# Altium PCB PCB1.PcbDoc
Units mm, origin at the board's own origin, x right, y up, seen from the top; angles counter-clockwise.
Board outline 22.22 x 65.28 mm, 2 copper layers (Top Layer, Bottom Layer), stack 1.571 mm thick; 28 components, 12 nets, 85 pads, 53 vias.
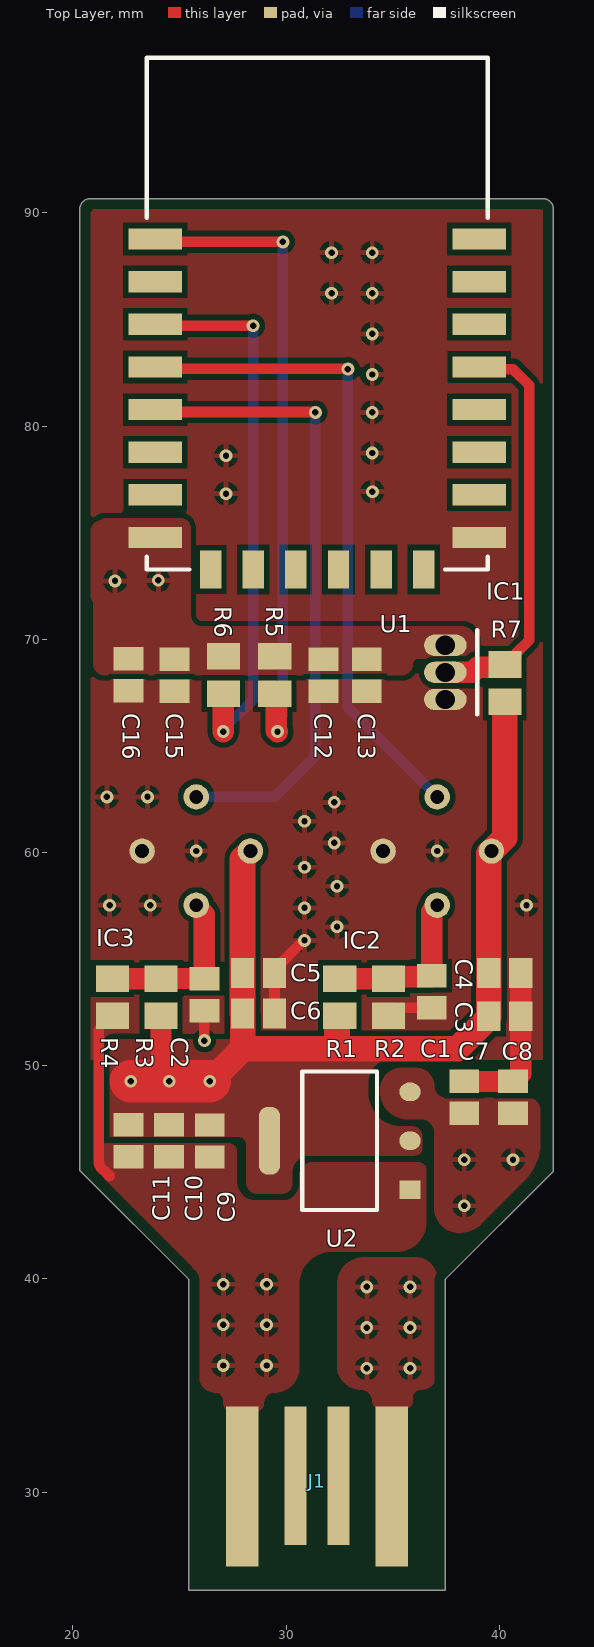
[diagram p0: Top Layer view]
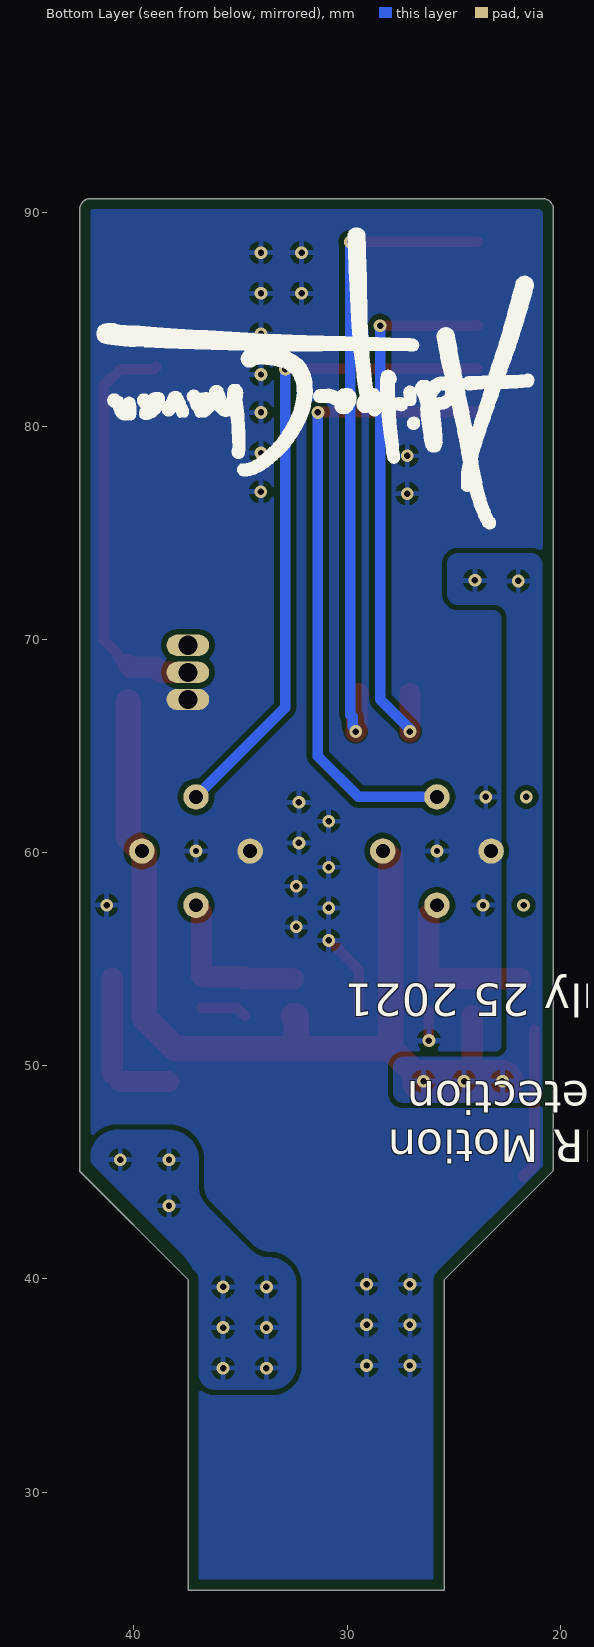
[diagram p1: Bottom Layer view, seen from below]

## Layer stack, top to bottom
Top Solder: solder mask 0.0102, Solder Resist, Dk 3.5
Top Layer: signal copper 0.0356
Dielectric 1: dielectric 1.5, FR-4, Dk 4.8
Bottom Layer: signal copper 0.0356
Bottom Solder: solder mask 0.0102, Solder Resist, Dk 3.5

## Board outline
20.32,45.085 20.32,50.8 20.32,90.17 cw(c20.828,90.17) 20.828,90.678 42.027,90.678 cw(c42.027,90.17) 42.535,90.17 42.535,90.16 42.535,50.8 42.535,45.05 37.455,39.97 37.455,25.4 25.435,25.4 25.435,39.97

## Design rules (kind name [scope] priority, off if disabled: settings)
BoardOutlineClearance [All] p1: gap=0.5 ignorepadtopadclearanceinfootprint=FALSE
Clearance [All] p1: gap=0.254 ignorepadtopadclearanceinfootprint=FALSE except(0: Arc-Hole Track-Hole SMDPad-Hole THPad-Hole Via-Hole Fill-Hole Poly-Hole Region-Hole Text-Hole)
ComponentClearance [All] p1: gap=0.051 collisioncheckmode=3 verticalgap=0 showdistances=FALSE
PolygonConnect PolygonConnect_12 [All vs IsNamedPolygon('GND_L01_P023')] p1: thpad.connectstyle=Direct thpad.reliefconductorwidth=0.254 thpad.reliefentries=4 thpad.polygonreliefangle="90 Angle" thpad.airgapwidth=0.254 smdpad.connectstyle=Direct smdpad.reliefconductorwidth=0.254 smdpad.reliefentries=4 smdpad.polygonreliefangle="90 Angle" smdpad.airgapwidth=0.254 via.connectstyle=Relief via.reliefconductorwidth=0.254 via.reliefentries=4 via.polygonreliefangle="90 Angle" via.airgapwidth=0.254
PolygonConnect PolygonConnect_11 [All vs IsNamedPolygon('+5_L01_P000') Or IsNamedPolygon('+5_L01_P001') Or IsNamedPolygon('GND_L01_P008') Or IsNamedPolygon('GND_L01_P013') Or IsNamedPolygon('GND_L01_P018') Or IsNamedPolygon('VCC_L01_P015') Or IsNamedPolygon('VCC_L01_P017') Or IsNamedPolygon('VCC_L01_P022') Or IsNamedPolygon('VCC_L01_P023') Or IsNamedPolygon('+5_L02_P002') Or IsNamedPolygon('GND_L02_P021') Or IsNamedPolygon('VCC_L02_P019')] p2: thpad.connectstyle=Direct thpad.reliefconductorwidth=0.254 thpad.reliefentries=4 thpad.polygonreliefangle="90 Angle" thpad.airgapwidth=0.254 smdpad.connectstyle=Direct smdpad.reliefconductorwidth=0.254 smdpad.reliefentries=4 smdpad.polygonreliefangle="90 Angle" smdpad.airgapwidth=0.254 via.connectstyle=Relief via.reliefconductorwidth=0.254 via.reliefentries=4 via.polygonreliefangle="90 Angle" via.airgapwidth=0.254
PolygonConnect PolygonConnect_10 [All vs IsNamedPolygon('+5_L01_P000') Or IsNamedPolygon('+5_L01_P001') Or IsNamedPolygon('GND_L01_P008') Or IsNamedPolygon('GND_L01_P013') Or IsNamedPolygon('GND_L01_P018') Or IsNamedPolygon('VCC_L01_P015') Or IsNamedPolygon('VCC_L01_P017') Or IsNamedPolygon('VCC_L01_P022') Or IsNamedPolygon('+5_L02_P021') Or IsNamedPolygon('GND_L02_P002') Or IsNamedPolygon('VCC_L02_P019')] p3: thpad.connectstyle=Direct thpad.reliefconductorwidth=0.254 thpad.reliefentries=4 thpad.polygonreliefangle="90 Angle" thpad.airgapwidth=0.254 smdpad.connectstyle=Direct smdpad.reliefconductorwidth=0.254 smdpad.reliefentries=4 smdpad.polygonreliefangle="90 Angle" smdpad.airgapwidth=0.254 via.connectstyle=Relief via.reliefconductorwidth=0.254 via.reliefentries=4 via.polygonreliefangle="90 Angle" via.airgapwidth=0.254
PolygonConnect PolygonConnect_9 [All vs IsNamedPolygon('VCC_L01_P017')] p4: thpad.connectstyle=Direct thpad.reliefconductorwidth=0.254 thpad.reliefentries=4 thpad.polygonreliefangle="90 Angle" thpad.airgapwidth=0.254 smdpad.connectstyle=Direct smdpad.reliefconductorwidth=0.254 smdpad.reliefentries=4 smdpad.polygonreliefangle="90 Angle" smdpad.airgapwidth=0.254 via.connectstyle=Relief via.reliefconductorwidth=0.254 via.reliefentries=4 via.polygonreliefangle="90 Angle" via.airgapwidth=0.254
PolygonConnect PolygonConnect_8 [All vs IsNamedPolygon('GND_L01_P013')] p5: thpad.connectstyle=Direct thpad.reliefconductorwidth=0.254 thpad.reliefentries=4 thpad.polygonreliefangle="90 Angle" thpad.airgapwidth=0.254 smdpad.connectstyle=Direct smdpad.reliefconductorwidth=0.254 smdpad.reliefentries=4 smdpad.polygonreliefangle="90 Angle" smdpad.airgapwidth=0.254 via.connectstyle=Relief via.reliefconductorwidth=0.254 via.reliefentries=4 via.polygonreliefangle="90 Angle" via.airgapwidth=0.254
PolygonConnect PolygonConnect_7 [All vs IsNamedPolygon('VCC_L02_P011')] p6: thpad.connectstyle=Direct thpad.reliefconductorwidth=0.254 thpad.reliefentries=4 thpad.polygonreliefangle="90 Angle" thpad.airgapwidth=0.254 smdpad.connectstyle=Direct smdpad.reliefconductorwidth=0.254 smdpad.reliefentries=4 smdpad.polygonreliefangle="90 Angle" smdpad.airgapwidth=0.254 via.connectstyle=Relief via.reliefconductorwidth=0.254 via.reliefentries=4 via.polygonreliefangle="90 Angle" via.airgapwidth=0.254
PolygonConnect PolygonConnect_6 [All vs IsNamedPolygon('GND_L01_P008')] p7: thpad.connectstyle=Direct thpad.reliefconductorwidth=0.254 thpad.reliefentries=4 thpad.polygonreliefangle="90 Angle" thpad.airgapwidth=0.254 smdpad.connectstyle=Direct smdpad.reliefconductorwidth=0.254 smdpad.reliefentries=4 smdpad.polygonreliefangle="90 Angle" smdpad.airgapwidth=0.254 via.connectstyle=Relief via.reliefconductorwidth=0.254 via.reliefentries=4 via.polygonreliefangle="90 Angle" via.airgapwidth=0.254
PolygonConnect PolygonConnect_5 [All vs IsNamedPolygon('GND_L01_P005')] p8: thpad.connectstyle=Direct thpad.reliefconductorwidth=0.254 thpad.reliefentries=4 thpad.polygonreliefangle="90 Angle" thpad.airgapwidth=0.254 smdpad.connectstyle=Direct smdpad.reliefconductorwidth=0.254 smdpad.reliefentries=4 smdpad.polygonreliefangle="90 Angle" smdpad.airgapwidth=0.254 via.connectstyle=Relief via.reliefconductorwidth=0.254 via.reliefentries=4 via.polygonreliefangle="90 Angle" via.airgapwidth=0.254
PolygonConnect PolygonConnect_4 [All vs IsNamedPolygon('VCC_L01_P004')] p9: thpad.connectstyle=Direct thpad.reliefconductorwidth=0.254 thpad.reliefentries=4 thpad.polygonreliefangle="90 Angle" thpad.airgapwidth=0.254 smdpad.connectstyle=Direct smdpad.reliefconductorwidth=0.254 smdpad.reliefentries=4 smdpad.polygonreliefangle="90 Angle" smdpad.airgapwidth=0.254 via.connectstyle=Relief via.reliefconductorwidth=0.254 via.reliefentries=4 via.polygonreliefangle="90 Angle" via.airgapwidth=0.254
PolygonConnect PolygonConnect_3 [All vs IsNamedPolygon('VCC_L01_P003')] p10: thpad.connectstyle=Direct thpad.reliefconductorwidth=0.254 thpad.reliefentries=4 thpad.polygonreliefangle="90 Angle" thpad.airgapwidth=0.254 smdpad.connectstyle=Direct smdpad.reliefconductorwidth=0.254 smdpad.reliefentries=4 smdpad.polygonreliefangle="90 Angle" smdpad.airgapwidth=0.254 via.connectstyle=Relief via.reliefconductorwidth=0.254 via.reliefentries=4 via.polygonreliefangle="90 Angle" via.airgapwidth=0.254
PolygonConnect PolygonConnect_2 [All vs IsNamedPolygon('+5_L01_P001')] p11: thpad.connectstyle=Direct thpad.reliefconductorwidth=0.254 thpad.reliefentries=4 thpad.polygonreliefangle="90 Angle" thpad.airgapwidth=0.254 smdpad.connectstyle=Direct smdpad.reliefconductorwidth=0.254 smdpad.reliefentries=4 smdpad.polygonreliefangle="90 Angle" smdpad.airgapwidth=0.254 via.connectstyle=Relief via.reliefconductorwidth=0.254 via.reliefentries=4 via.polygonreliefangle="90 Angle" via.airgapwidth=0.254
PolygonConnect PolygonConnect_1 [All vs IsNamedPolygon('+5_L01_P000')] p12: thpad.connectstyle=Direct thpad.reliefconductorwidth=0.254 thpad.reliefentries=4 thpad.polygonreliefangle="90 Angle" thpad.airgapwidth=0.254 smdpad.connectstyle=Direct smdpad.reliefconductorwidth=0.254 smdpad.reliefentries=4 smdpad.polygonreliefangle="90 Angle" smdpad.airgapwidth=0.254 via.connectstyle=Relief via.reliefconductorwidth=0.254 via.reliefentries=4 via.polygonreliefangle="90 Angle" via.airgapwidth=0.254
PolygonConnect [All] p13: connectstyle=Relief reliefconductorwidth=0.254 reliefentries=4 polygonreliefangle="90 Angle" airgapwidth=0.254
RoomDefinition esp12f-1 [InComponentClass('esp12f-1')] p1: confinementstyle=ConfineIn formatcopy=TRUE lockcomponents=FALSE outline 0,0 50.8,0 50.8,25.4 0,25.4
RoutingVias [All] p1: holewidth=0.711 width=1.27 viastyle="Through Hole" minholewidth=0.711 minwidth=1.27 maxholewidth=0.711 maxwidth=1.27
SolderMaskExpansion [All] p1: expansion=0.102 istentingtop=FALSE
Width [All] p1: maxlimit=3 minlimit=0.254 preferedwidth=0.254
29 further rules are at their usual default settings.

## Components (designator, comment, footprint, x,y, rotation, side; value= is the part's Value field where it differs from the comment)
C1 "Cap Pol3" C0805 36.83,53.467 r270 top value=10u
C2 "Cap Pol3" C0805 26.162,53.34 r270 top value=10u
C3 "Cap Pol3" C0805 40.259,52.324 r0 top value=100u
C4 "Cap Pol3" C0805 40.259,54.356 r0 top value=100n
C5 "Cap Pol3" C0805 28.702,54.356 r0 top value=100u
C6 "Cap Pol3" C0805 28.702,52.451 r0 top value=100n
C7 "Cap Pol3" C0805 38.354,48.514 r90 top value=100u
C8 "Cap Pol3" C0805 40.64,48.514 r90 top value=1u
C9 "Cap Pol3" C0805 26.416,46.47 r270 top value=100u
C10 "Cap Pol3" C0805 24.511,46.482 r270 top value=10u
C11 "Cap Pol3" C0805 22.606,46.482 r270 top value=1u
C12 "Cap Pol3" C0805 31.75,68.326 r270 top value=100n
C13 "Cap Pol3" C0805 33.782,68.326 r270 top value=100n
C15 "Cap Pol3" C0805 24.765,68.326 r270 top value=10u
C16 "Cap Pol3" C0805 22.606,68.338 r270 top value=100n
IC1 "esp-12f" esp12f 31.455,85.279 r0 top
IC2 "BS412" BS412 34.544,60.071 r270 top locked
IC3 "BS412" BS412 23.241,60.071 r270 top locked
J1 "USB-A" USB-A-PCB 31.455,30.462 r90 top locked
R1 "WSLP0805R0400FEA" RESC2013X58X38NL25T25 32.512,53.213 r270 top
R2 "WSLP0805R0400FEA" RESC2013X58X38NL25T25 34.798,53.213 r270 top
R3 "WSLP0805R0400FEA" RESC2013X58X38NL25T25 24.13,53.213 r270 top
R4 "WSLP0805R0400FEA" RESC2013X58X38NL25T25 21.844,53.213 r270 top
R5 "WSLP0805R0400FEA" RESC2013X58X38NL25T25 29.464,68.326 r90 top
R6 "WSLP0805R0400FEA" RESC2013X58X38NL25T25 27.051,68.326 r90 top
R7 "WSLP0805R0400FEA" RESC2013X58X38NL25T25 40.259,67.945 r90 top
U1 "DS18B20+" Q3+1 37.465,68.453 r0 top
U2 "AMS1117-3.3" FP-AMS1117-IPC_C 32.512,46.482 r180 top

## Footprints (in the part's own frame and the unit in brackets; to place one, negate y for a bottom-side part, rotate by r counter-clockwise, add the part's x,y. Pads: shape width x height; smd on the part's side, far side on the other; paste and mask are expansions set on the pad)
BS412 [mm]
  round 1.192 hole 0.65: 1(0,0) 2(2.54,2.54) 3(0,5.08) 4(-2.54,2.54)
  silkscreen extent 60.07,-34.54 60.07,-34.54, body extent -4.55,-2.01 4.55,7.09, height 4.3
C0805 [mm] "Chip Capacitor, Body 2.0x1.3mm, IPC High Density"
  rect 1.1x1.4 smd: 1(-0.75,0) 2(0.75,0)
  body extent -1.1,-0.72 1.1,0.72, height 1.4
esp12f [mm]
  rect 2.5x1 smd: 1(-7.6,3.5) 2(-7.6,1.5) 3(-7.6,-0.5) 4(-7.6,-2.5) 5(-7.6,-4.5) 6(-7.6,-6.5) 7(-7.6,-8.5) 8(-7.6,-10.5) 15(7.6,-10.5) 16(7.6,-8.5) 17(7.6,-6.5) 18(7.6,-4.5) 19(7.6,-2.5) 20(7.6,-0.5) 21(7.6,1.5) 22(7.6,3.5)
  rect 1x1.8 smd: 9(-5,-12) 10(-3,-12) 11(-1,-12) 12(1,-12) 13(3,-12) 14(5,-12)
  silkscreen extent -31.45,-85.28 8,12, body extent -8,-12 8,12, height 3.2
FP-AMS1117-IPC_C [mm]
  rect 1.004x0.872 smd paste+0 mask+0: 1(-3.295,2.29)
  rrect100% 1.004x0.872 smd paste+0 mask+0: 2(-3.295,0) 3(-3.295,-2.29)
  rrect87% 1.004x3.182 smd paste+0 mask+0: 4(3.295,0)
  silkscreen extent -1.75,-3.25 32.51,46.48, body extent -3.9,-3.35 3.9,3.35, height 0.25
Q3+1 [mm] "TO, Flat Index; 3 In-Line, Axial Leads; Body Dia. 4.7mm; Leads 0.56 x 0.51 mm (max)"
  oval 2x1 hole 0.9: 1(0,-1.27) 2(0,0) 3(0,1.27)
  silkscreen extent 1.5,-1.98 1.5,1.98, body extent -2.48,-2.5 1.5,2.5, height 4.96
RESC2013X58X38NL25T25 [mm] "Chip Resistor, 2-Leads, Body 2.03x1.27mm, IPC Medium Density"
  rect 1.25x1.55 smd: 1(-0.875,0) 2(0.875,0)
  body extent -1.14,-0.76 1.14,0.76, height 0.59
USB-A-PCB [mil]
  rect 296x60 smd paste-196.85: 1(-7.87,-137.8) 4(-7.87,138)
  rect 256x40 smd paste-196.85: 2(12,-39.37) 3(12,40)

## Part data
C1 C2 C3 C4 C5 C6 C7 C8 C9 C10 C11 C12 C13 C15 C16: "Polarized Capacitor (Surface Mount)", LatestRevisionDate=29-May-2009, LatestRevisionNote="IPC-7351 Footprint Added.", PackageDescription="Chip Capacitor", PackageReference=C0805, Published=8-Jun-2000, Publisher="Altium Limited"
IC1: "Integrated Circuit", Manufacturer_Name=Ai-Thinker, Datasheet Link=https://docs.ai-thinker.com/_media/esp8266/docs/esp-12f_product_specification_en.pdf, Height=3.1mm, Manufacturer_Part_Number=esp-12f
IC2 IC3: "Integrated Circuit", Manufacturer_Name="Senba Sensing Tech", Datasheet Link=https://datasheet.lcsc.com/szlcsc/1910111742_Senba-Sensing-Tech-BS412_C410378.pdf, Height=4.2mm, Manufacturer_Part_Number=BS412
J1: library part USB-A-PCB, "USB-A PCB footprint", Part number IPS=N.A., Artikkelnr Noca=N.A., ComponentLink1Description=Datasheet, ComponentLink2Description="Supplier link", Footprint Doc=USB-A-PCB, LatestRevisionDate=2014-06-04, Part Number=USB-A-PCB, Pin Count=4, Published=2014-06-04, Publisher="Nordic Semiconductor"
R1 R2 R3 R4 R5 R6 R7: library part CMP-2001-04325-1, Manufacturer="Vishay Dale", Part Number=WSLP0805R0400FEA
U1: library part CMP-0253-00003-1, "Programmable Resolution Digital Thermometer, 1-Wire Interface, ±0.5°C Accuracy, 3-Pin TO92, -55°C to +125°C, Pb-Free", Code_JEDEC=TO-226-AA, ComponentLink1Description="Manufacturer URL", ComponentLink1URL=http://www.maxim-ic.com, ComponentLink2Description=Datasheet, ComponentLink2URL=http://datasheets.maxim-ic.com/en/ds/DS18B20.pdf, DatasheetVersion=2007, PackageDescription="TO-92 Package, Body Dia. 4.7mm; Leads 0.51 x 0.51 mm (max), Pb-Free", PackageReference=Q3+1, PackageVersion="revB, 2009"
U2: library part CMP-209535-000001-1, "LDO Voltage Regulators 1A, 3.3V", Dropout Voltage=1.1V, Manufacturer="Advanced Monolithic Systems", Max Junction Temp=+125°C, Max Power Dissipation=1.2W, Max Supply Voltage=15V, Nominal Supply Current=5mA, Output Current=1A, Output Voltage=3.3V, Package=AMS1117, Temperature="-40°C to +125°C", Temperature Range Low=-40°C, Automotive=No, Category=IC, ComponentLink2Description=Datasheet, ComponentLink2URL=http://www.advanced-monolithic.com/pdf/ds1117.pdf, Device Class L1="Integrated Circuits (ICs)", Device Class L2="Power Management ICs", Device Class L3="Voltage Regulators - Linear", Height=1.8mm, Ipc Land Pattern Name=SOT229P700X180-4, Lead Free=Yes, Manufacturer Part Number=AMS1117-3.3, Number Of Outputs=1, Octopart=https://octopart.com/ams1117-3.3-advanced+monolithic+systems-25899300, Output Type=Fixed, RoHs=TRUE, Standoff Height=0.64mm, Temperature Range High=+125°C

## Via types
v1: diameter 0.6, hole 0.3, Top Layer to Bottom Layer, 53 vias

## Nets (pads, with @x,y where several pads share a name; then routed paths per layer and width w, separated by ;. In a path a pad name is that pad's centre, name@x,y a point inside that pad or via, vN(x,y) a via of type N, cw(c..) or ccw(c..) an arc to the next point about the centre after c; other vN are vias at no path point)
+5: C7.1 C8.1 J1.1 U2.3
  other v1: 33.782,35.814 35.814,35.814 33.782,37.719 35.814,37.719 33.782,39.624 35.814,39.624 38.354,43.434 38.354,45.593 40.64,45.593
GND: C1.2 C2.2 C3.2 C4.2 C5.2 C6.2 C7.2 C8.2 C9.2 C10.2 C11.2 C12.2 C13.2 C15.2 C16.2 IC1.15 IC2.1 IC3.1 J1.4 R2.2 R4.2 U1.1 U2.1 | length 21.2
  Top Layer w0.5: 21.209,51.689 21.209,45.52 ccw(c21.709,45.522) 21.378,45.146 21.562,44.985 cw(c21.231,44.61) 21.585,44.963 21.716,44.832 ; v1(26.162,51.181) C2.2 ; C6.2 C5.2@29.452,54.102 ; C5.2 29.452,54.506 30.826,55.88 v1(30.861,55.88) ; R2.2 35.173,52.713 35.612,52.713 35.616,52.717 C1.2
  Top Layer w1: C7.2 C8.2 ; C8.2@41.009,49.633 C3.2 C4.2@41.009,54.102
  other v1: 27.051,35.941 29.083,35.941 27.051,37.846 29.083,37.846 27.051,39.751 29.083,39.751 32.385,56.515 30.861,57.404 21.717,57.531 23.622,57.531 41.275,57.531 32.385,58.42 30.861,59.309 25.781,60.071 37.084,60.071 32.258,60.452 30.861,61.468 32.258,62.357 21.59,62.611 23.495,62.611 27.178,76.835 34.044,76.927 27.178,78.613 34.036,78.74 34.036,80.645 34.036,82.423 34.036,84.328 32.131,86.233 34.036,86.233 32.131,88.138 34.036,88.138
NetIC1_1: IC1.1 R5.1 | length 30.8
  Top Layer w0.5: IC1.1@23.866,88.652 23.869,88.649 29.842,88.649 v1(29.845,88.646)
  Top Layer w1: R5.1 29.539,67.376 29.539,65.725 v1(29.591,65.673)
  Bottom Layer w0.5: v1@29.591,65.786 29.738,65.933 29.738,66.357 29.845,66.464 v1(29.845,88.646)
NetIC1_3: IC1.3 R6.1 | length 25.9
  Top Layer w0.5: IC1.3@23.877,84.744 23.912,84.709 v1(28.448,84.709)
  Top Layer w1: v1(27.051,65.673) R6.1
  Bottom Layer w0.5: v1@27.051,65.719 27.07,65.719 27.07,65.805 28.448,67.183 v1(28.448,84.709)
NetLabel11: IC1.13
OnTime1: C1.1 IC2.2 R1.1 R2.1 | length 7.8
  Top Layer w1: R1.1 R2.1 34.877,54.167 36.78,54.167 C1.1 36.83,57.225 37.084,57.479 IC2.2
OnTime2: C2.1 IC3.2 R3.1 R4.1 | length 7.9
  Top Layer w1: R4.1 R3.1 24.131,54.089 C2.1 C2.1 26.162,57.098 25.781,57.479 IC3.2
PIR1: IC1.4 IC2.4 | length 30.8
  Top Layer w0.5: IC1.4@23.898,82.696 32.874,82.696 v1(32.893,82.677)
  Bottom Layer w0.5: v1(32.893,82.677) 32.893,66.802 IC2.4
PIR2: IC1.5 IC3.4 | length 30
  Top Layer w0.5: IC1.5@23.854,80.652 23.866,80.664 31.35,80.664 v1(31.369,80.645)
  Bottom Layer w0.5: IC3.4 29.464,62.611 31.369,64.516 v1(31.369,80.645)
SCK: IC1.20
SDA: IC1.19 R7.2 U1.2 | length 19.4
  Top Layer w0.5: IC1.19@38.953,82.779 39.055,82.677 40.64,82.677 41.402,81.915 41.402,69.963 40.784,69.345 40.784,69.195 40.409,68.82 R7.2
  Top Layer w1: U1.2 38.735,68.453 38.977,68.695 40.134,68.695 R7.2
VCC: C3.1 C4.1 C5.1 C6.1 C9.1 C10.1 C11.1 C12.1 C13.1 C15.1 C16.1 IC1.8 IC2.3 IC3.3 R1.2 R3.2 R5.2 R6.2 R7.1 U1.3 U2.2 U2.4 | length 47.4
  Top Layer w1: R3.2 24.13,49.73 24.511,49.349 v1(24.511,49.276)
  Top Layer w1.2: v1(26.416,49.276) 26.435,49.276 27.959,50.8 ; IC3.3 27.952,59.702 27.952,54.102 C6.1 27.959,52.444 27.959,50.8 ; R1.2 32.41,52.338 32.385,52.313 32.385,50.8 ; R7.1 40.259,60.706 39.509,59.956 39.509,54.102 C3.1 39.509,52.274 38.035,50.8 32.385,50.8 ; 27.959,50.8 32.385,50.8
  Top Layer w2: v1(22.713,49.276) v1(24.511,49.276) v1(26.416,49.276)
  other v1: 21.971,72.744 24.003,72.771
pads on no net: IC1.2 IC1.6 IC1.7 IC1.9 IC1.10 IC1.11 IC1.12 IC1.14 IC1.16 IC1.17 IC1.18 IC1.21 IC1.22 J1.2 J1.3

## Polygon pours and split planes (outlines as drawn)
VCC on Top Layer "VCC_L01_P017" (solid, pour order 17): 28.132,46.283 ccw(c27.751,46.283) 27.751,46.664 21.655,46.664 cw(c21.655,47.044) 21.274,47.044 21.274,50.729 cw(c21.782,50.728) 21.782,51.236 34.482,51.236 cw(c34.482,50.728) 34.99,50.728 34.99,50.347 ccw(c34.99,49.204) 33.847,49.204 33.847,48.696 ccw(c35.371,48.695) 35.371,47.172 35.879,47.172 cw(c35.879,46.664) 36.387,46.664 36.387,46.156 cw(c36.006,46.155) 36.006,45.775 31.053,45.775 ccw(c31.053,45.013) 30.291,45.013 30.291,44.505 cw(c29.783,44.505) 29.783,43.997 28.64,43.997 cw(c28.64,44.505) 28.132,44.505
+5 on Top Layer "+5_L01_P000" (solid, pour order 0): 35.433,49.911 ccw(c35.433,48.895) 34.417,48.895 34.417,48.768 ccw(c35.687,48.768) 35.687,47.498 36.322,47.498 cw(c36.322,46.863) 36.957,46.863 36.957,43.307 ccw(c38.1,43.307) 38.1,42.164 ccw(c38.1,43.697) 39.184,42.613 41.166,44.595 ccw(c39.37,46.391) 41.91,46.391 41.91,47.879 ccw(c41.275,47.879) 41.275,48.514 37.465,48.514 cw(c37.465,49.022) 36.957,49.022 ccw(c36.068,49.022) 36.068,49.911
VCC on Top Layer "VCC_L01_P022" (solid, pour order 22): 20.955,75.057 20.955,68.834 ccw(c21.463,68.834) 21.463,68.326 35.433,68.326 ccw(c35.433,68.834) 35.941,68.834 cw(c36.195,68.834) 36.195,69.088 38.227,69.088 ccw(c38.227,69.723) 38.862,69.723 38.862,69.977 ccw(c38.227,69.977) 38.227,70.612 26.035,70.612 cw(c26.035,71.12) 25.527,71.12 25.527,75.184 ccw(c25.019,75.184) 25.019,75.692 21.59,75.692 ccw(c21.59,75.057)
VCC on Top Layer "VCC_L01_P018" (solid, pour order 18): 21.336,75.565 ccw(c21.336,75.057) 20.828,75.057 20.828,72.136 ccw(c21.463,72.136) 21.463,71.501 24.892,71.501 ccw(c24.892,72.009) 25.4,72.009 25.4,74.93 ccw(c24.765,74.93) 24.765,75.565
GND on Top Layer "GND_L01_P023" (solid, pour order 23): 42.545,90.17 42.545,50.292 20.32,50.292 20.32,90.17
VCC on Top Layer "VCC_L01_P015" (solid, pour order 15): 21.59,75.327 ccw(c21.59,74.819) 21.082,74.819 21.082,72.66 ccw(c22.098,72.66) 22.098,71.644 24.257,71.644 ccw(c24.257,72.66) 25.273,72.66 25.273,75.057 ccw(c25.003,75.057) 25.003,75.327
GND on Top Layer "GND_L01_P013" (solid, pour order 13): 27.686,45.974 ccw(c27.305,45.974) 27.305,46.355 21.59,46.355 ccw(c21.59,45.974) 21.209,45.974 21.209,45.497 ccw(c22.51,45.497) 21.59,44.577 25.459,40.708 cw(c24.375,39.624) 25.908,39.624 ccw(c26.797,39.624) 26.797,38.735 29.593,38.735 ccw(c29.593,39.749) 30.607,39.749 cw(c32.133,39.749) 32.133,41.275 35.179,41.275 ccw(c35.179,42.672) 36.576,42.672 36.576,45.085 ccw(c36.195,45.085) 36.195,45.466 31.242,45.466 ccw(c31.242,44.831) 30.607,44.831 30.607,44.45 cw(c29.845,44.45) 29.845,43.688 28.575,43.688 cw(c28.575,44.577) 27.686,44.577
GND on Top Layer "GND_L01_P008" (solid, pour order 8): 28.956,34.163 cw(c29.464,34.163) 29.464,34.671 ccw(c29.464,35.814) 30.607,35.814 30.607,39.624 ccw(c29.337,39.624) 29.337,40.894 26.924,40.894 ccw(c26.924,39.878) 25.908,39.878 25.908,35.433 ccw(c26.67,35.433) 26.67,34.671 cw(c26.67,34.29) 27.051,34.29 27.051,34.163 ccw(c27.432,34.163) 27.432,33.782 28.575,33.782 ccw(c28.575,34.163)
+5 on Top Layer "+5_L01_P001" (solid, pour order 1): 34.036,34.29 ccw(c33.528,34.29) 33.528,34.798 cw(c33.528,35.941) 32.385,35.941 32.385,39.751 cw(c33.655,39.751) 33.655,41.021 36.068,41.021 cw(c36.068,40.005) 37.084,40.005 37.084,35.56 cw(c36.322,35.56) 36.322,34.798 ccw(c36.322,34.417) 35.941,34.417 35.941,34.29 cw(c35.56,34.29) 35.56,33.909 34.417,33.909 cw(c34.417,34.29)
GND on Bottom Layer "GND_L02_P021" (solid, pour order 21): 42.545,90.17 42.545,45.085 37.465,40.005 37.465,25.4 25.4,25.4 25.4,40.005 20.32,45.085 20.32,90.17
VCC on Bottom Layer "VCC_L02_P019" (solid, pour order 19): 20.854,48.768 ccw(c21.362,48.768) 21.362,48.26 27.331,48.26 ccw(c27.331,48.768) 27.839,48.768 27.839,49.911 ccw(c27.331,49.911) 27.331,50.419 23.013,50.419 cw(c23.013,50.927) 22.505,50.927 22.505,70.993 cw(c23.14,70.993) 23.14,71.628 24.791,71.628 ccw(c24.791,72.136) 25.299,72.136 25.299,73.533 ccw(c24.791,73.533) 24.791,74.041 21.362,74.041 ccw(c21.362,73.533) 20.854,73.533
+5 on Bottom Layer "+5_L02_P002" (solid, pour order 2): 33.528,34.798 cw(c33.528,35.941) 32.385,35.941 32.385,39.751 cw(c33.655,39.751) 33.655,41.021 ccw(c33.655,42.247) 34.522,41.38 36.576,43.434 ccw(c35.656,44.354) 36.957,44.354 36.957,45.593 cw(c38.354,45.593) 38.354,46.99 40.767,46.99 cw(c40.767,45.72) 42.037,45.72 cw(c41.424,45.72) 41.857,45.286 37.701,41.13 ccw(c39.497,39.334) 36.957,39.334 36.957,35.56 cw(c36.195,35.56) 36.195,34.798

## Silkscreen, mask and mechanical layers (free items; w line width, h text height)
Top Overlay:
  circle w0: c0,0 r0
Bottom Overlay:
  drawing of 6 lines, arcs and shapes, not listed
  text "PIR Motion / Detection /  / July 25 2021" at 17.023,53.848 h1.52 r180
Board Mechanical:
  the board outline again, w0.127

## Dimensions
39.624,60.071 to 42.535,90.16 on Mechanical 13
20.32,60.071 to 23.241,60.071 on Mechanical 13

## Text inside footprints (layer, text, board x,y; h text height)
J1: Top 3D Body "0.030in [0.75mm]" at 12.352,13.362 h2.29 r180; Top 3D Body "45" at 13.704,-20.291 h2.29 r180; Top 3D Body "o" at 9.577,-22.831 h1.22 r180; Top 3D Body "DETAIL A" at 31.402,-34.263 h3.81 r180; Top 3D Body "0.025in [0.625mm]" at 56.235,-5.789 h2.29 r180